# EAGLE board SparkFun_PWM_Shield_Panel_v12b (EAGLE 7.5.0)
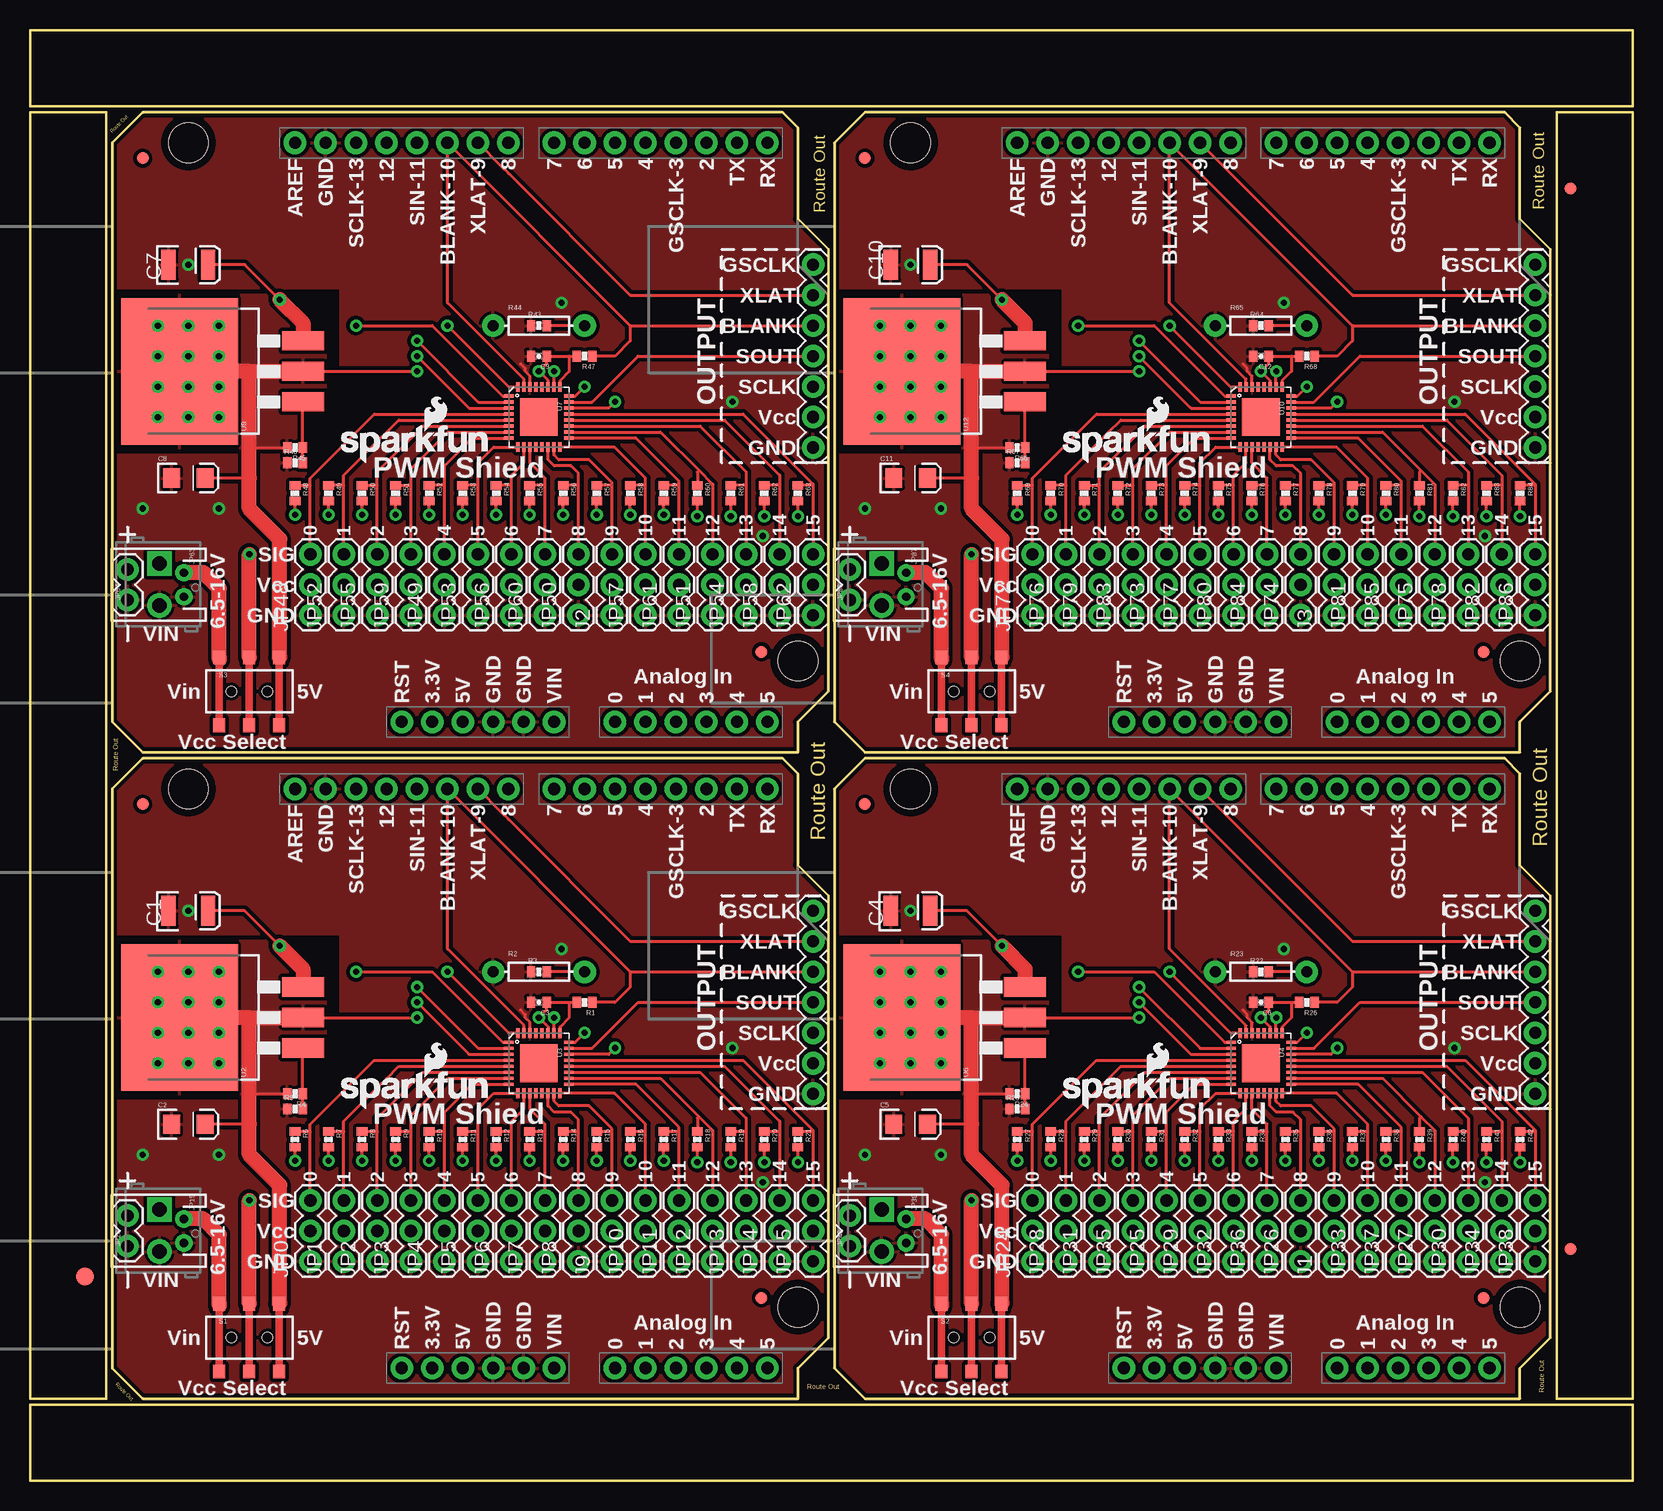
[diagram p0: board, top side]
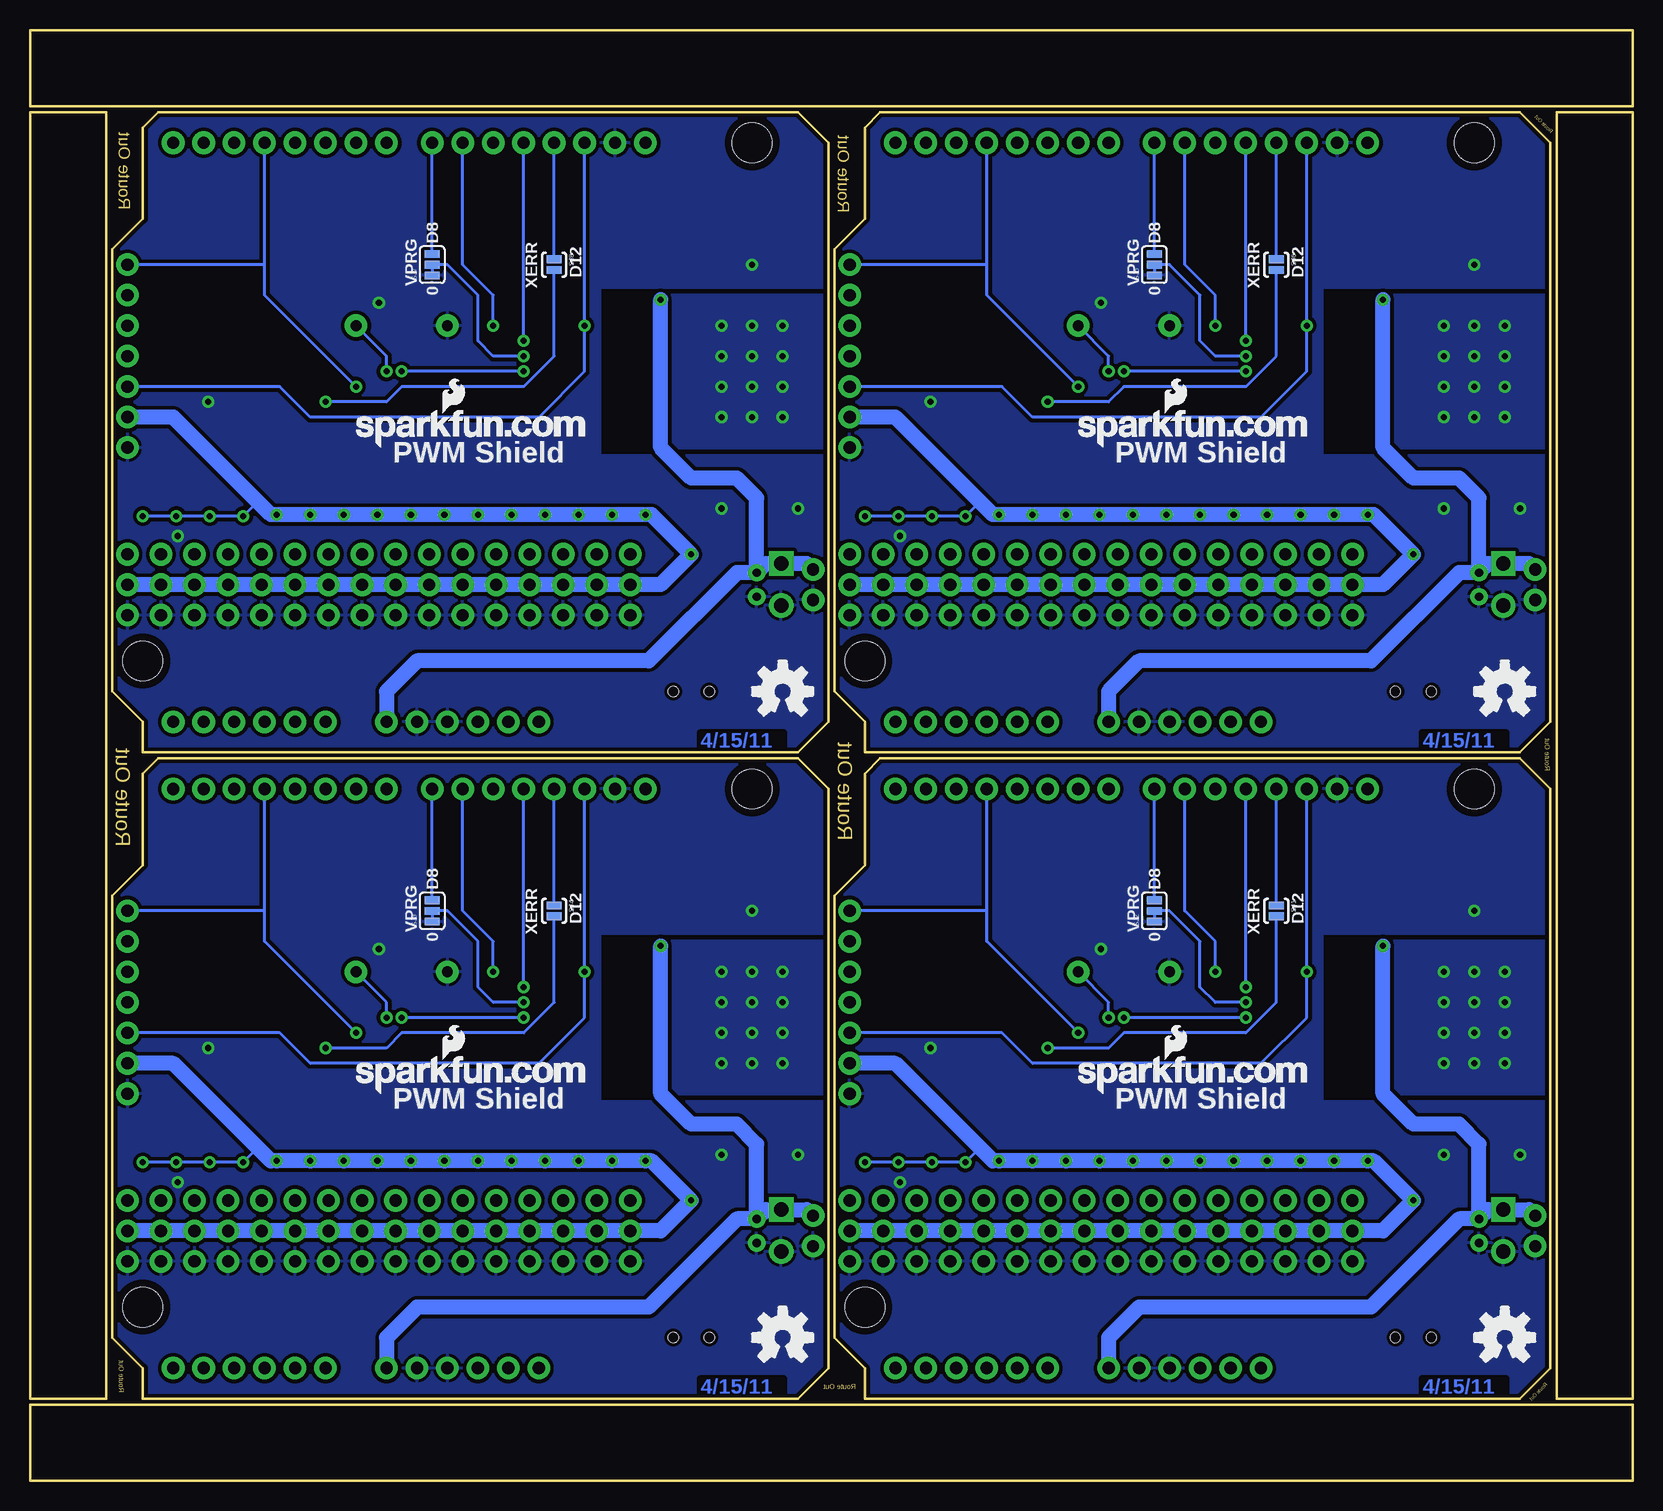
[diagram p1: board, bottom side, seen from below]

Size 133.6 x 120.9 mm. Coordinates in mm from the lower left corner, seen from the top.
Outline: 6.35,79.25 6.35,6.86 0,6.86 0,29.72
Outline: 0,27.18 0,114.05 6.35,114.05 6.35,76.71
Outline: 79.25,0 0,0 0,6.35 29.72,6.35
Outline: 27.18,6.35 133.6,6.35 133.6,0 76.71,0
Outline: 133.6,79.25 133.6,6.86 127.25,6.86 127.25,29.72
Outline: 127.25,27.18 127.25,114.05 133.6,114.05 133.6,76.71
Outline: 54.36,120.9 133.6,120.9 133.6,114.55 103.89,114.55
Outline: 106.43,114.55 0,114.55 0,120.9 56.9,120.9
Outline: 6.86,57.66 9.4,60.2 62.74,60.2 64.01,58.93 64.01,51.31 66.55,48.77 66.55,11.94 64.01,9.4 64.01,6.86 9.4,6.86 6.86,9.4 6.86,57.66
Outline: 67.06,57.66 69.6,60.2 122.94,60.2 124.21,58.93 124.21,51.31 126.75,48.77 126.75,11.94 124.21,9.4 124.21,6.86 69.6,6.86 67.06,9.4 67.06,57.66
Outline: 6.86,111.51 9.4,114.05 62.74,114.05 64.01,112.78 64.01,105.16 66.55,102.62 66.55,65.79 64.01,63.25 64.01,60.71 9.4,60.71 6.86,63.25 6.86,111.51
Outline: 67.06,111.51 69.6,114.05 122.94,114.05 124.21,112.78 124.21,105.16 126.75,102.62 126.75,65.79 124.21,63.25 124.21,60.71 69.6,60.71 67.06,63.25 67.06,111.51
Copper layers (1*16): Top 0.035mm / dielectric 1.5mm / Bottom 0.035mm
Design rules "SparkFun *": minimum track width 8mil, minimum drill 20mil, track to track 8mil, track to pad 8mil, pad to pad 8mil, via to via 8mil, smd to smd 8mil, copper to edge 8mil, drill to drill 8mil, minimum pad ring 12mil, minimum via ring 10mil, stop-mask expansion 4mil, vias tented up to drill 20mil, thermal gap 10mil

## Footprints (pad centres in the part's own frame; a part is rotated, then mirrored left to right if it is on the bottom)
EIA3528 = smd 1.2 x 2.5: A 1.65,0; C -1.65,0
EIA3216 = smd 1.4 x 1.6: A 1.4,0; C -1.4,0
0402-CAP = smd 0.7 x 0.9: 1 -0.65,0; 2 0.65,0
FIDUCIAL-1.5X3 = smd 1.5 x 1.5: 1 0,0
FIDUCIAL-1X2 = smd 1 x 1: 1 0,0
1X03 = drill 1.016 pad 1.88: 1 0,0; 2 2.54,0; 3 5.08,0
1X07 = drill 1.016 pad 1.88: 1 0,0; 2 2.54,0; 3 5.08,0; 4 7.62,0; 5 10.16,0; 6 12.7,0; 7 15.24,0
SCREWTERMINAL-3.5MM-2-NS = drill 1.2 pad 2.032 square: 1 0,0 | drill 1.2 pad 2.032: 2 3.5,0
JST-2-PTH = drill 0.7 pad 1.448: 1 -1,0; 2 1,0
1X02 = drill 1.016 pad 1.88: 1 0,0; 2 2.54,0
0402-RES = smd 0.7 x 0.9: 1 -0.65,0; 2 0.65,0
AXIAL-0.3 = drill 0.9 pad 1.88: P$1 -3.81,0; P$2 3.81,0
AYZ0202 = smd 1 x 1.15: 1 -2.5,2.825; 2 0,2.825; 3 2.5,2.825; 4 -2.5,-2.825; 5 0,-2.825; 6 2.5,-2.825 | hole 0.85: 1.5,0; -1.5,0
SJ_2S-NO = smd 0.635 x 1.27: 1 -0.45,0; 2 0.45,0
SJ_3 = smd 0.635 x 1.27: 1 -0.889,0; 2 0,0; 3 0.889,0
DUEMILANOVE_SHIELD_NOLABELS = drill 1.016 pad 1.88: 3.3V 50.8,26.67; 5V 50.8,29.21; A0 50.8,41.91; A1 50.8,44.45; A2 50.8,46.99; A3 50.8,49.53; A4 50.8,52.07; A5 50.8,54.61; AREF 2.54,15.24; D2 2.54,49.53; D3 2.54,46.99; D4 2.54,44.45; D5 2.54,41.91; D6 2.54,39.37; D7 2.54,36.83; D8 2.54,33.02; D9 2.54,30.48; D10 2.54,27.94; D11 2.54,25.4; D12 2.54,22.86; D13 2.54,20.32; GND@0 50.8,31.75; GND@1 50.8,34.29; GND@2 2.54,17.78; RES 50.8,24.13; RX 2.54,54.61; TX 2.54,52.07; VIN 50.8,36.83 | hole 3.302: 45.72,57.15; 2.54,6.35
D2PACK/A = smd 1.6 x 3.5: 1 -2.54,-8.275; 2 0,-8.275; 3 2.54,-8.275 | smd 12.2 x 9.75: TAB 0,2
QFN-32 = smd 0.285 x 0.8: 1 -1.75,-2.5; 2 -1.25,-2.5; 3 -0.75,-2.5; 4 -0.25,-2.5; 5 0.25,-2.5; 6 0.75,-2.5; 7 1.25,-2.5; 8 1.75,-2.5; 17 1.75,2.5; 18 1.25,2.5; 19 0.75,2.5; 20 0.25,2.5; 21 -0.25,2.5; 22 -0.75,2.5; 23 -1.25,2.5; 24 -1.75,2.5 | smd 0.8 x 0.285: 9 2.5,-1.75; 10 2.5,-1.25; 11 2.5,-0.75; 12 2.5,-0.25; 13 2.5,0.25; 14 2.5,0.75; 15 2.5,1.25; 16 2.5,1.75; 25 -2.5,1.75; 26 -2.5,1.25; 27 -2.5,0.75; 28 -2.5,0.25; 29 -2.5,-0.25; 30 -2.5,-0.75; 31 -2.5,-1.25; 32 -2.5,-1.75 | smd 3.15 x 3.15: EP 0,0

## Placement (x,y rotation side)
C1  10uF  [EIA3528]  13.21,47.5 0 top
C2  10uF  [EIA3216]  13.21,29.72 0 top
C3  0.1uF  [0402-CAP]  42.42,39.88 180 top
C4  10uF  [EIA3528]  73.41,47.5 0 top
C5  10uF  [EIA3216]  73.41,29.72 0 top
C6  0.1uF  [0402-CAP]  102.62,39.88 180 top
C7  10uF  [EIA3528]  13.21,101.35 0 top
C8  10uF  [EIA3216]  13.21,83.57 0 top
C9  0.1uF  [0402-CAP]  42.42,93.73 180 top
C10  10uF  [EIA3528]  73.41,101.35 0 top
C11  10uF  [EIA3216]  73.41,83.57 0 top
C12  0.1uF  [0402-CAP]  102.62,93.73 180 top
E$1  [FIDUCIAL-1.5X3]  4.57,17.02 0 top
E$5  [FIDUCIAL-1X2]  128.4,19.3 0 top
E$6  [FIDUCIAL-1X2]  128.4,107.7 180 top
J1  OUT  [1X03]  108.71,18.29 90 top
J2  OUT  [1X03]  48.51,72.14 90 top
J3  OUT  [1X03]  108.71,72.14 90 top
J9  OUT  [1X03]  48.51,18.29 90 top
JP0  OUT  [1X03]  23.37,18.29 90 top
JP1  OUT  [1X03]  26.16,18.29 90 top
JP2  OUT  [1X03]  28.96,18.29 90 top
JP3  OUT  [1X03]  31.75,18.29 90 top
JP4  OUT  [1X03]  34.54,18.29 90 top
JP5  OUT  [1X03]  37.34,18.29 90 top
JP6  OUT  [1X03]  40.13,18.29 90 top
JP7  OUT  [1X03]  42.93,18.29 90 top
JP8  OUT  [1X03]  45.72,18.29 90 top
JP9  [1X07]  65.28,47.5 270 top
JP10  OUT  [1X03]  51.31,18.29 90 top
JP11  OUT  [1X03]  54.1,18.29 90 top
JP12  OUT  [1X03]  56.9,18.29 90 top
JP13  OUT  [1X03]  59.69,18.29 90 top
JP14  OUT  [1X03]  62.48,18.29 90 top
JP15  OUT  [1X03]  65.28,18.29 90 top
JP16  LOGO-SFENEW  [SFE-NEW-WEBLOGO]  46.23,32.26 0 bottom
JP17  LOGO-SFESK  [SFE-LOGO-FLAME]  32.89,33.66 0 top
JP18  LOGO-SFENW2  [SFE-NEW-WEB]  25.91,30.99 0 top
JP19  SCREW  [SCREWTERMINAL-3.5MM-2-NS]  10.79,22.61 270 top
JP20  JST  [JST-2-PTH]  12.83,20.83 90 top
JP21  PTH  [1X02]  8.13,19.56 90 top
JP22  FIDUCIAL1X2  [FIDUCIAL-1X2]  60.96,15.24 0 top
JP23  FIDUCIAL1X2  [FIDUCIAL-1X2]  9.4,56.39 0 top
JP24  OUT  [1X03]  83.57,18.29 90 top
JP25  OUT  [1X03]  94.74,18.29 90 top
JP26  OUT  [1X03]  105.92,18.29 90 top
JP27  OUT  [1X03]  117.09,18.29 90 top
JP28  OUT  [1X03]  86.36,18.29 90 top
JP29  OUT  [1X03]  97.54,18.29 90 top
JP30  OUT  [1X03]  119.89,18.29 90 top
JP31  OUT  [1X03]  89.15,18.29 90 top
JP32  OUT  [1X03]  100.33,18.29 90 top
JP33  OUT  [1X03]  111.51,18.29 90 top
JP34  OUT  [1X03]  122.68,18.29 90 top
JP35  OUT  [1X03]  91.95,18.29 90 top
JP36  OUT  [1X03]  103.12,18.29 90 top
JP37  OUT  [1X03]  114.3,18.29 90 top
JP38  OUT  [1X03]  125.48,18.29 90 top
JP39  SCREW  [SCREWTERMINAL-3.5MM-2-NS]  70.99,22.61 270 top
JP40  JST  [JST-2-PTH]  73.03,20.83 90 top
JP41  PTH  [1X02]  68.33,19.56 90 top
JP42  LOGO-SFENW2  [SFE-NEW-WEB]  86.11,30.99 0 top
JP43  [1X07]  125.48,47.5 270 top
JP44  LOGO-SFENEW  [SFE-NEW-WEBLOGO]  106.43,32.26 0 bottom
JP45  LOGO-SFESK  [SFE-LOGO-FLAME]  93.09,33.66 0 top
JP46  FIDUCIAL1X2  [FIDUCIAL-1X2]  121.16,15.24 0 top
JP47  FIDUCIAL1X2  [FIDUCIAL-1X2]  69.6,56.39 0 top
JP48  OUT  [1X03]  23.37,72.14 90 top
JP49  OUT  [1X03]  34.54,72.14 90 top
JP50  OUT  [1X03]  45.72,72.14 90 top
JP51  OUT  [1X03]  56.9,72.14 90 top
JP52  OUT  [1X03]  26.16,72.14 90 top
JP53  OUT  [1X03]  37.34,72.14 90 top
JP54  OUT  [1X03]  59.69,72.14 90 top
JP55  OUT  [1X03]  28.96,72.14 90 top
JP56  OUT  [1X03]  40.13,72.14 90 top
JP57  OUT  [1X03]  51.31,72.14 90 top
JP58  OUT  [1X03]  62.48,72.14 90 top
JP59  OUT  [1X03]  31.75,72.14 90 top
JP60  OUT  [1X03]  42.93,72.14 90 top
JP61  OUT  [1X03]  54.1,72.14 90 top
JP62  OUT  [1X03]  65.28,72.14 90 top
JP63  SCREW  [SCREWTERMINAL-3.5MM-2-NS]  10.79,76.45 270 top
JP64  JST  [JST-2-PTH]  12.83,74.68 90 top
JP65  PTH  [1X02]  8.13,73.41 90 top
JP66  LOGO-SFENW2  [SFE-NEW-WEB]  25.91,84.84 0 top
JP67  [1X07]  65.28,101.35 270 top
JP68  LOGO-SFENEW  [SFE-NEW-WEBLOGO]  46.23,86.11 0 bottom
JP69  LOGO-SFESK  [SFE-LOGO-FLAME]  32.89,87.5 0 top
JP70  FIDUCIAL1X2  [FIDUCIAL-1X2]  60.96,69.09 0 top
JP71  FIDUCIAL1X2  [FIDUCIAL-1X2]  9.4,110.24 0 top
JP72  OUT  [1X03]  83.57,72.14 90 top
JP73  OUT  [1X03]  94.74,72.14 90 top
JP74  OUT  [1X03]  105.92,72.14 90 top
JP75  OUT  [1X03]  117.09,72.14 90 top
JP76  OUT  [1X03]  86.36,72.14 90 top
JP77  OUT  [1X03]  97.54,72.14 90 top
JP78  OUT  [1X03]  119.89,72.14 90 top
JP79  OUT  [1X03]  89.15,72.14 90 top
JP80  OUT  [1X03]  100.33,72.14 90 top
JP81  OUT  [1X03]  111.51,72.14 90 top
JP82  OUT  [1X03]  122.68,72.14 90 top
JP83  OUT  [1X03]  91.95,72.14 90 top
JP84  OUT  [1X03]  103.12,72.14 90 top
JP85  OUT  [1X03]  114.3,72.14 90 top
JP86  OUT  [1X03]  125.48,72.14 90 top
JP87  SCREW  [SCREWTERMINAL-3.5MM-2-NS]  70.99,76.45 270 top
JP88  JST  [JST-2-PTH]  73.03,74.68 90 top
JP89  PTH  [1X02]  68.33,73.41 90 top
JP90  LOGO-SFENW2  [SFE-NEW-WEB]  86.11,84.84 0 top
JP91  [1X07]  125.48,101.35 270 top
JP92  LOGO-SFENEW  [SFE-NEW-WEBLOGO]  106.43,86.11 0 bottom
JP93  LOGO-SFESK  [SFE-LOGO-FLAME]  93.09,87.5 0 top
JP94  FIDUCIAL1X2  [FIDUCIAL-1X2]  121.16,69.09 0 top
JP95  FIDUCIAL1X2  [FIDUCIAL-1X2]  69.6,110.24 0 top
R1  10k  [0402-RES]  46.23,39.88 180 top
R2  R2  [AXIAL-0.3]  42.42,42.42 0 top
R3  2.2k  [0402-RES]  42.42,42.42 0 top
R4  240  [0402-RES]  22.1,32.26 180 top
R5  715  [0402-RES]  22.1,30.99 0 top
R6  2.2k  [0402-RES]  22.1,28.45 270 top
R7  2.2k  [0402-RES]  24.89,28.45 270 top
R8  2.2k  [0402-RES]  27.69,28.45 270 top
R9  2.2k  [0402-RES]  30.48,28.45 270 top
R10  2.2k  [0402-RES]  33.27,28.45 270 top
R11  2.2k  [0402-RES]  36.07,28.45 270 top
R12  2.2k  [0402-RES]  38.86,28.45 270 top
R13  2.2k  [0402-RES]  41.66,28.45 270 top
R14  2.2k  [0402-RES]  44.45,28.45 270 top
R15  2.2k  [0402-RES]  47.24,28.45 270 top
R16  2.2k  [0402-RES]  50.04,28.45 270 top
R17  2.2k  [0402-RES]  52.83,28.45 270 top
R18  2.2k  [0402-RES]  55.63,28.45 270 top
R19  2.2k  [0402-RES]  58.42,28.45 270 top
R20  2.2k  [0402-RES]  61.21,28.45 270 top
R21  2.2k  [0402-RES]  64.01,28.45 270 top
R22  2.2k  [0402-RES]  102.62,42.42 0 top
R23  R2  [AXIAL-0.3]  102.62,42.42 0 top
R24  240  [0402-RES]  82.3,32.26 180 top
R25  715  [0402-RES]  82.3,30.99 0 top
R26  10k  [0402-RES]  106.43,39.88 180 top
R27  2.2k  [0402-RES]  82.3,28.45 270 top
R28  2.2k  [0402-RES]  85.09,28.45 270 top
R29  2.2k  [0402-RES]  87.88,28.45 270 top
R30  2.2k  [0402-RES]  90.68,28.45 270 top
R31  2.2k  [0402-RES]  93.47,28.45 270 top
R32  2.2k  [0402-RES]  96.27,28.45 270 top
R33  2.2k  [0402-RES]  99.06,28.45 270 top
R34  2.2k  [0402-RES]  101.85,28.45 270 top
R35  2.2k  [0402-RES]  104.65,28.45 270 top
R36  2.2k  [0402-RES]  107.44,28.45 270 top
R37  2.2k  [0402-RES]  110.24,28.45 270 top
R38  2.2k  [0402-RES]  113.03,28.45 270 top
R39  2.2k  [0402-RES]  115.82,28.45 270 top
R40  2.2k  [0402-RES]  118.62,28.45 270 top
R41  2.2k  [0402-RES]  121.41,28.45 270 top
R42  2.2k  [0402-RES]  124.21,28.45 270 top
R43  2.2k  [0402-RES]  42.42,96.27 0 top
R44  R2  [AXIAL-0.3]  42.42,96.27 0 top
R45  240  [0402-RES]  22.1,86.11 180 top
R46  715  [0402-RES]  22.1,84.84 0 top
R47  10k  [0402-RES]  46.23,93.73 180 top
R48  2.2k  [0402-RES]  22.1,82.3 270 top
R49  2.2k  [0402-RES]  24.89,82.3 270 top
R50  2.2k  [0402-RES]  27.69,82.3 270 top
R51  2.2k  [0402-RES]  30.48,82.3 270 top
R52  2.2k  [0402-RES]  33.27,82.3 270 top
R53  2.2k  [0402-RES]  36.07,82.3 270 top
R54  2.2k  [0402-RES]  38.86,82.3 270 top
R55  2.2k  [0402-RES]  41.66,82.3 270 top
R56  2.2k  [0402-RES]  44.45,82.3 270 top
R57  2.2k  [0402-RES]  47.24,82.3 270 top
R58  2.2k  [0402-RES]  50.04,82.3 270 top
R59  2.2k  [0402-RES]  52.83,82.3 270 top
R60  2.2k  [0402-RES]  55.63,82.3 270 top
R61  2.2k  [0402-RES]  58.42,82.3 270 top
R62  2.2k  [0402-RES]  61.21,82.3 270 top
R63  2.2k  [0402-RES]  64.01,82.3 270 top
R64  2.2k  [0402-RES]  102.62,96.27 0 top
R65  R2  [AXIAL-0.3]  102.62,96.27 0 top
R66  240  [0402-RES]  82.3,86.11 180 top
R67  715  [0402-RES]  82.3,84.84 0 top
R68  10k  [0402-RES]  106.43,93.73 180 top
R69  2.2k  [0402-RES]  82.3,82.3 270 top
R70  2.2k  [0402-RES]  85.09,82.3 270 top
R71  2.2k  [0402-RES]  87.88,82.3 270 top
R72  2.2k  [0402-RES]  90.68,82.3 270 top
R73  2.2k  [0402-RES]  93.47,82.3 270 top
R74  2.2k  [0402-RES]  96.27,82.3 270 top
R75  2.2k  [0402-RES]  99.06,82.3 270 top
R76  2.2k  [0402-RES]  101.85,82.3 270 top
R77  2.2k  [0402-RES]  104.65,82.3 270 top
R78  2.2k  [0402-RES]  107.44,82.3 270 top
R79  2.2k  [0402-RES]  110.24,82.3 270 top
R80  2.2k  [0402-RES]  113.03,82.3 270 top
R81  2.2k  [0402-RES]  115.82,82.3 270 top
R82  2.2k  [0402-RES]  118.62,82.3 270 top
R83  2.2k  [0402-RES]  121.41,82.3 270 top
R84  2.2k  [0402-RES]  124.21,82.3 270 top
S1  DPDT  [AYZ0202]  18.29,11.94 0 top
S2  DPDT  [AYZ0202]  78.49,11.94 0 top
S3  DPDT  [AYZ0202]  18.29,65.79 0 top
S4  DPDT  [AYZ0202]  78.49,65.79 0 top
SJ1  XERR  [SJ_2S-NO]  29.72,47.5 270 bottom
SJ2  VPRG  [SJ_3]  39.88,47.5 90 bottom
SJ3  VPRG  [SJ_3]  100.08,47.5 90 bottom
SJ4  XERR  [SJ_2S-NO]  89.92,47.5 270 bottom
SJ5  VPRG  [SJ_3]  39.88,101.35 90 bottom
SJ6  XERR  [SJ_2S-NO]  29.72,101.35 270 bottom
SJ7  VPRG  [SJ_3]  100.08,101.35 90 bottom
SJ8  XERR  [SJ_2S-NO]  89.92,101.35 270 bottom
U1  ARDUINO_SHIELDNOLABELS  [DUEMILANOVE_SHIELD_NOLABELS]  6.86,60.2 270 top
U2  V_REG_LD1085D2  [D2PACK/A]  14.48,38.61 90 top
U3  TLC5940-RHB  [QFN-32]  42.42,34.8 270 top
U4  TLC5940-RHB  [QFN-32]  102.62,34.8 270 top
U5  ARDUINO_SHIELDNOLABELS  [DUEMILANOVE_SHIELD_NOLABELS]  67.06,60.2 270 top
U6  V_REG_LD1085D2  [D2PACK/A]  74.68,38.61 90 top
U7  TLC5940-RHB  [QFN-32]  42.42,88.65 270 top
U8  ARDUINO_SHIELDNOLABELS  [DUEMILANOVE_SHIELD_NOLABELS]  6.86,114.05 270 top
U9  V_REG_LD1085D2  [D2PACK/A]  14.48,92.46 90 top
U10  TLC5940-RHB  [QFN-32]  102.62,88.65 270 top
U11  ARDUINO_SHIELDNOLABELS  [DUEMILANOVE_SHIELD_NOLABELS]  67.06,114.05 270 top
U12  V_REG_LD1085D2  [D2PACK/A]  74.68,92.46 90 top
U$1  OSHW-LOGOORB  [OSHW-LOGO-GO]  10.67,11.94 0 bottom
U$2  OSHW-LOGOORB  [OSHW-LOGO-GO]  70.87,11.94 0 bottom
U$3  OSHW-LOGOORB  [OSHW-LOGO-GO]  10.67,65.79 0 bottom
U$4  OSHW-LOGOORB  [OSHW-LOGO-GO]  70.87,65.79 0 bottom

## Library data of the parts
C1-C12 J1-J3 J9 JP0 JP1-JP95 R1-R84 S1-S4 SJ1-SJ8 U1-U12 U$1-U$4 = SparkFun
E$1 = SparkFun-Retired
E$5 E$6 = SparkFun-Aesthetics

## Nets
5V: C2.A C3.1 R1.2 R4.2 S1.3 U2.2 U2.TAB U3.25 U3.27
5V1: C5.A C6.1 R24.2 R26.2 S2.3 U4.25 U4.27 U6.2 U6.TAB
5V2: C8.A C9.1 R45.2 R47.2 S3.3 U7.25 U7.27 U9.2 U9.TAB
5V3: C11.A C12.1 R66.2 R68.2 S4.3 U10.25 U10.27 U12.2 U12.TAB
BLANK: JP9.3 R1.1 U1.D10 U3.31
BLANK1: JP43.3 R26.1 U4.31 U5.D10
BLANK2: JP67.3 R47.1 U7.31 U8.D10
BLANK3: JP91.3 R68.1 U10.31 U11.D10
D1: SJ3.3 U5.D8
D2: SJ4.1 U5.D12
D3: SJ5.3 U8.D8
D4: SJ6.1 U8.D12
D5: SJ7.3 U11.D8
D6: SJ8.1 U11.D12
D8: SJ2.3 U1.D8
D12: SJ1.1 U1.D12
GND: C1.C C2.C C3.2 J9.1 JP0.1 JP1.1 JP2.1 JP3.1 JP4.1 JP5.1 JP6.1 JP7.1 JP8.1 JP9.7 JP10.1 JP11.1 JP12.1 JP13.1 JP14.1 JP15.1 JP19.2 JP20.1 JP21.1 R2.P$1 R3.1 R5.1 SJ2.1 U1.GND@0 U1.GND@1 U1.GND@2 U3.30
GND1: C4.C C5.C C6.2 J1.1 JP24.1 JP25.1 JP26.1 JP27.1 JP28.1 JP29.1 JP30.1 JP31.1 JP32.1 JP33.1 JP34.1 JP35.1 JP36.1 JP37.1 JP38.1 JP39.2 JP40.1 JP41.1 JP43.7 R22.1 R23.P$1 R25.1 SJ3.1 U4.30 U5.GND@0 U5.GND@1 U5.GND@2
GND2: C7.C C8.C C9.2 J2.1 JP48.1 JP49.1 JP50.1 JP51.1 JP52.1 JP53.1 JP54.1 JP55.1 JP56.1 JP57.1 JP58.1 JP59.1 JP60.1 JP61.1 JP62.1 JP63.2 JP64.1 JP65.1 JP67.7 R43.1 R44.P$1 R46.1 SJ5.1 U7.30 U8.GND@0 U8.GND@1 U8.GND@2
GND3: C10.C C11.C C12.2 J3.1 JP72.1 JP73.1 JP74.1 JP75.1 JP76.1 JP77.1 JP78.1 JP79.1 JP80.1 JP81.1 JP82.1 JP83.1 JP84.1 JP85.1 JP86.1 JP87.2 JP88.1 JP89.1 JP91.7 R64.1 R65.P$1 R67.1 SJ7.1 U10.30 U11.GND@0 U11.GND@1 U11.GND@2
GSCLK: JP9.1 U1.D3 U3.24
GSCLK1: JP43.1 U4.24 U5.D3
GSCLK2: JP67.1 U7.24 U8.D3
GSCLK3: JP91.1 U10.24 U11.D3
N$1: R22.2 R23.P$2 U4.26
N$2: R4.1 R5.2 U2.1
N$3: R24.1 R25.2 U6.1
N$4: R43.2 R44.P$2 U7.26
N$5: R45.1 R46.2 U9.1
N$6: R64.2 R65.P$2 U10.26
N$7: R66.1 R67.2 U12.1
N$8: R2.P$2 R3.2 U3.26
OUT0: JP0.3 R6.1 U3.4
OUT1: JP1.3 R7.1 U3.5
OUT2: JP2.3 R8.1 U3.6
OUT3: JP3.3 R9.1 U3.7
OUT4: JP4.3 R10.1 U3.8
OUT5: JP5.3 R11.1 U3.9
OUT6: JP6.3 R12.1 U3.10
OUT7: JP7.3 R13.1 U3.11
OUT8: JP8.3 R14.1 U3.14
OUT9: J9.3 R15.1 U3.15
OUT10: JP10.3 R16.1 U3.16
OUT11: JP11.3 R17.1 U3.17
OUT12: JP12.3 R18.1 U3.18
OUT13: JP13.3 R19.1 U3.19
OUT14: JP14.3 R20.1 U3.20
OUT15: JP15.3 R21.1 U3.21
OUT16: JP24.3 R27.1 U4.4
OUT17: JP31.3 R29.1 U4.6
OUT18: JP28.3 R28.1 U4.5
OUT19: JP35.3 R30.1 U4.7
OUT20: JP25.3 R31.1 U4.8
OUT21: JP29.3 R32.1 U4.9
OUT22: JP32.3 R33.1 U4.10
OUT23: JP36.3 R34.1 U4.11
OUT24: JP26.3 R35.1 U4.14
OUT25: J1.3 R36.1 U4.15
OUT26: JP33.3 R37.1 U4.16
OUT27: JP37.3 R38.1 U4.17
OUT28: JP27.3 R39.1 U4.18
OUT29: JP30.3 R40.1 U4.19
OUT30: JP34.3 R41.1 U4.20
OUT31: JP38.3 R42.1 U4.21
OUT32: JP48.3 R48.1 U7.4
OUT33: JP55.3 R50.1 U7.6
OUT34: JP52.3 R49.1 U7.5
OUT35: JP59.3 R51.1 U7.7
OUT36: JP49.3 R52.1 U7.8
OUT37: JP53.3 R53.1 U7.9
OUT38: JP56.3 R54.1 U7.10
OUT39: JP60.3 R55.1 U7.11
OUT40: JP50.3 R56.1 U7.14
OUT41: J2.3 R57.1 U7.15
OUT42: JP57.3 R58.1 U7.16
OUT43: JP61.3 R59.1 U7.17
OUT44: JP51.3 R60.1 U7.18
OUT45: JP54.3 R61.1 U7.19
OUT46: JP58.3 R62.1 U7.20
OUT47: JP62.3 R63.1 U7.21
OUT48: JP72.3 R69.1 U10.4
OUT49: JP79.3 R71.1 U10.6
OUT50: JP76.3 R70.1 U10.5
OUT51: JP83.3 R72.1 U10.7
OUT52: JP73.3 R73.1 U10.8
OUT53: JP77.3 R74.1 U10.9
OUT54: JP80.3 R75.1 U10.10
OUT55: JP84.3 R76.1 U10.11
OUT56: JP74.3 R77.1 U10.14
OUT57: J3.3 R78.1 U10.15
OUT58: JP81.3 R79.1 U10.16
OUT59: JP85.3 R80.1 U10.17
OUT60: JP75.3 R81.1 U10.18
OUT61: JP78.3 R82.1 U10.19
OUT62: JP82.3 R83.1 U10.20
OUT63: JP86.3 R84.1 U10.21
SCLK: JP9.5 U1.D13 U3.1
SCLK1: JP43.5 U4.1 U5.D13
SCLK2: JP67.5 U7.1 U8.D13
SCLK3: JP91.5 U10.1 U11.D13
SIN: U1.D11 U3.2
SIN1: U4.2 U5.D11
SIN2: U7.2 U8.D11
SIN3: U10.2 U11.D11
SOUT: JP9.4 U3.23
SOUT1: JP43.4 U4.23
SOUT2: JP67.4 U7.23
SOUT3: JP91.4 U10.23
VCC: J9.2 JP0.2 JP1.2 JP2.2 JP3.2 JP4.2 JP5.2 JP6.2 JP7.2 JP8.2 JP9.6 JP10.2 JP11.2 JP12.2 JP13.2 JP14.2 JP15.2 R6.2 R7.2 R8.2 R9.2 R10.2 R11.2 R12.2 R13.2 R14.2 R15.2 R16.2 R17.2 R18.2 R19.2 R20.2 R21.2 S1.2
VCC1: J1.2 JP24.2 JP25.2 JP26.2 JP27.2 JP28.2 JP29.2 JP30.2 JP31.2 JP32.2 JP33.2 JP34.2 JP35.2 JP36.2 JP37.2 JP38.2 JP43.6 R27.2 R28.2 R29.2 R30.2 R31.2 R32.2 R33.2 R34.2 R35.2 R36.2 R37.2 R38.2 R39.2 R40.2 R41.2 R42.2 S2.2
VCC2: J2.2 JP48.2 JP49.2 JP50.2 JP51.2 JP52.2 JP53.2 JP54.2 JP55.2 JP56.2 JP57.2 JP58.2 JP59.2 JP60.2 JP61.2 JP62.2 JP67.6 R48.2 R49.2 R50.2 R51.2 R52.2 R53.2 R54.2 R55.2 R56.2 R57.2 R58.2 R59.2 R60.2 R61.2 R62.2 R63.2 S3.2
VCC3: J3.2 JP72.2 JP73.2 JP74.2 JP75.2 JP76.2 JP77.2 JP78.2 JP79.2 JP80.2 JP81.2 JP82.2 JP83.2 JP84.2 JP85.2 JP86.2 JP91.6 R69.2 R70.2 R71.2 R72.2 R73.2 R74.2 R75.2 R76.2 R77.2 R78.2 R79.2 R80.2 R81.2 R82.2 R83.2 R84.2 S4.2
VIN: C1.A JP19.1 JP20.2 JP21.2 S1.1 U1.VIN U2.3
VIN1: C4.A JP39.1 JP40.2 JP41.2 S2.1 U5.VIN U6.3
VIN2: C7.A JP63.1 JP64.2 JP65.2 S3.1 U8.VIN U9.3
VIN3: C10.A JP87.1 JP88.2 JP89.2 S4.1 U11.VIN U12.3
VPRG: SJ2.2 U3.3
VPRG1: SJ3.2 U4.3
VPRG2: SJ5.2 U7.3
VPRG3: SJ7.2 U10.3
XERR: SJ1.2 U3.22
XERR1: SJ4.2 U4.22
XERR2: SJ6.2 U7.22
XERR3: SJ8.2 U10.22
XLAT: JP9.2 U1.D9 U3.32
XLAT1: JP43.2 U4.32 U5.D9
XLAT2: JP67.2 U7.32 U8.D9
XLAT3: JP91.2 U10.32 U11.D9

## Tracks (layer width: path | path; a pad name or v marks a point on that pad's centre or on a via)
5V  (via drill 0.51)
  Top 0.254: 18.29,29.72 C2.A | 18.29,32.26 R4.2 | U3.27 43.17,37.86 v42.42,38.61 43.07,39.26 C3.1 44.96,39.88 | 13.21,38.61 v13.21,37.34 | 44.96,39.88 R1.2 | U3.25 44.17,37.82 44.96,38.61 44.96,39.88 | U2.2 23.37,38.61 v32.26,38.61
  Top 0.635: 20.79,9.14 S1.3
  Top 0.762: 13.21,38.61 U2.TAB
  Top 1.27: 18.29,38.61 13.21,38.61 | 18.29,38.61 23.37,38.61 | 18.29,38.61 18.29,29.72 18.29,27.18 20.83,24.64 20.83,14.8 S1.3
  Bottom 0.254: v32.26,38.61 v42.42,38.61
  other vias: 10.67,42.42 13.21,42.42 10.67,34.8 13.21,34.8 10.67,39.88 13.21,39.88 10.67,37.34 15.75,42.42 15.75,39.88 15.75,37.34 15.75,34.8
  pour Top (isolate 0.305): 6.86,44.96 6.86,32.26 24.64,32.26 24.64,44.96
  pour Bottom (isolate 0.305): 6.86,44.96 24.64,44.96 24.64,32.26 6.86,32.26
5V1  (via drill 0.51)
  Top 0.254: 78.49,29.72 C5.A | 78.49,32.26 R24.2 | U4.27 103.37,37.86 v102.62,38.61 103.27,39.26 C6.1 105.16,39.88 | 73.41,38.61 v73.41,37.34 | 105.16,39.88 R26.2 | U4.25 104.37,37.82 105.16,38.61 105.16,39.88 | U6.2 83.57,38.61 v92.46,38.61
  Top 0.635: 80.99,9.14 S2.3
  Top 0.762: 73.41,38.61 U6.TAB
  Top 1.27: 78.49,38.61 73.41,38.61 | 78.49,38.61 83.57,38.61 | 78.49,38.61 78.49,29.72 78.49,27.18 81.03,24.64 81.03,14.8 S2.3
  Bottom 0.254: v92.46,38.61 v102.62,38.61
  other vias: 70.87,42.42 73.41,42.42 70.87,34.8 73.41,34.8 70.87,39.88 73.41,39.88 70.87,37.34 75.95,42.42 75.95,39.88 75.95,37.34 75.95,34.8
  pour Top (isolate 0.305): 67.06,44.96 67.06,32.26 84.84,32.26 84.84,44.96
  pour Bottom (isolate 0.305): 67.06,44.96 84.84,44.96 84.84,32.26 67.06,32.26
5V2  (via drill 0.51)
  Top 0.254: 18.29,83.57 C8.A | 18.29,86.11 R45.2 | U7.27 43.17,91.71 v42.42,92.46 43.07,93.11 C9.1 44.96,93.73 | 13.21,92.46 v13.21,91.19 | 44.96,93.73 R47.2 | U7.25 44.17,91.67 44.96,92.46 44.96,93.73 | U9.2 23.37,92.46 v32.26,92.46
  Top 0.635: 20.79,62.99 S3.3
  Top 0.762: 13.21,92.46 U9.TAB
  Top 1.27: 18.29,92.46 13.21,92.46 | 18.29,92.46 23.37,92.46 | 18.29,92.46 18.29,83.57 18.29,81.03 20.83,78.49 20.83,68.65 S3.3
  Bottom 0.254: v32.26,92.46 v42.42,92.46
  other vias: 10.67,96.27 13.21,96.27 10.67,88.65 13.21,88.65 10.67,93.73 13.21,93.73 10.67,91.19 15.75,96.27 15.75,93.73 15.75,91.19 15.75,88.65
  pour Top (isolate 0.305): 6.86,98.81 6.86,86.11 24.64,86.11 24.64,98.81
  pour Bottom (isolate 0.305): 6.86,98.81 24.64,98.81 24.64,86.11 6.86,86.11
5V3  (via drill 0.51)
  Top 0.254: 78.49,83.57 C11.A | 78.49,86.11 R66.2 | U10.27 103.37,91.71 v102.62,92.46 103.27,93.11 C12.1 105.16,93.73 | 73.41,92.46 v73.41,91.19 | 105.16,93.73 R68.2 | U10.25 104.37,91.67 105.16,92.46 105.16,93.73 | U12.2 83.57,92.46 v92.46,92.46
  Top 0.635: 80.99,62.99 S4.3
  Top 0.762: 73.41,92.46 U12.TAB
  Top 1.27: 78.49,92.46 73.41,92.46 | 78.49,92.46 83.57,92.46 | 78.49,92.46 78.49,83.57 78.49,81.03 81.03,78.49 81.03,68.65 S4.3
  Bottom 0.254: v92.46,92.46 v102.62,92.46
  other vias: 70.87,96.27 73.41,96.27 70.87,88.65 73.41,88.65 70.87,93.73 73.41,93.73 70.87,91.19 75.95,96.27 75.95,93.73 75.95,91.19 75.95,88.65
  pour Top (isolate 0.305): 67.06,98.81 67.06,86.11 84.84,86.11 84.84,98.81
  pour Bottom (isolate 0.305): 67.06,98.81 84.84,98.81 84.84,86.11 67.06,86.11
BLANK
  Top 0.254: U3.31 41.17,37.95 34.8,44.32 U1.D10 50.04,42.42 | R1.1 48.77,39.88 50.04,41.15 50.04,42.42 | 50.04,42.42 JP9.3
BLANK1
  Top 0.254: U4.31 101.37,37.95 95,44.32 U5.D10 110.24,42.42 | R26.1 108.97,39.88 110.24,41.15 110.24,42.42 | 110.24,42.42 JP43.3
BLANK2
  Top 0.254: U7.31 41.17,91.8 34.8,98.17 U8.D10 50.04,96.27 | R47.1 48.77,93.73 50.04,95 50.04,96.27 | 50.04,96.27 JP67.3
BLANK3
  Top 0.254: U10.31 101.37,91.8 95,98.17 U11.D10 110.24,96.27 | R68.1 108.97,93.73 110.24,95 110.24,96.27 | 110.24,96.27 JP91.3
D1
  Bottom 0.254: SJ3.3 U5.D8
D2
  Bottom 0.254: SJ4.1 U5.D12
D3
  Bottom 0.254: SJ5.3 U8.D8
D4
  Bottom 0.254: SJ6.1 U8.D12
D5
  Bottom 0.254: SJ7.3 U11.D8
D6
  Bottom 0.254: SJ8.1 U11.D12
D8
  Bottom 0.254: SJ2.3 U1.D8
D12
  Bottom 0.254: SJ1.1 U1.D12
GND  (via drill 0.51)
  Top 0.254: U3.30 41.67,38.22 41.27,38.61 41.27,38.86 40.89,39.24
  other vias: 9.4,27.18 44.32,44.32 58.55,36.07 13.21,47.5 61.09,24.89 15.75,27.18
  pour Top (isolate 0.305): 6.86,60.2 6.86,45.59 25.91,45.59 25.91,31.62 6.86,31.62 6.86,6.86 66.55,6.86 66.55,60.2
  pour Bottom (isolate 0.305): 6.86,60.2 6.86,45.59 25.91,45.59 25.91,31.62 6.86,31.62 6.86,6.86 66.55,6.86 66.55,60.2
GND1  (via drill 0.51)
  Top 0.254: U4.30 101.87,38.22 101.47,38.61 101.47,38.86 101.09,39.24
  other vias: 69.6,27.18 104.52,44.32 118.75,36.07 73.41,47.5 121.28,24.89 75.95,27.18
  pour Top (isolate 0.305): 67.06,60.2 67.06,45.59 86.11,45.59 86.11,31.62 67.06,31.62 67.06,6.86 126.75,6.86 126.75,60.2
  pour Bottom (isolate 0.305): 67.06,60.2 67.06,45.59 86.11,45.59 86.11,31.62 67.06,31.62 67.06,6.86 126.75,6.86 126.75,60.2
GND2  (via drill 0.51)
  Top 0.254: U7.30 41.67,92.06 41.27,92.46 41.27,92.71 40.89,93.09
  other vias: 9.4,81.03 44.32,98.17 58.55,89.92 13.21,101.35 61.09,78.74 15.75,81.03
  pour Top (isolate 0.305): 6.86,114.05 6.86,99.44 25.91,99.44 25.91,85.47 6.86,85.47 6.86,60.71 66.55,60.71 66.55,114.05
  pour Bottom (isolate 0.305): 6.86,114.05 6.86,99.44 25.91,99.44 25.91,85.47 6.86,85.47 6.86,60.71 66.55,60.71 66.55,114.05
GND3  (via drill 0.51)
  Top 0.254: U10.30 101.87,92.06 101.47,92.46 101.47,92.71 101.09,93.09
  other vias: 69.6,81.03 104.52,98.17 118.75,89.92 73.41,101.35 121.28,78.74 75.95,81.03
  pour Top (isolate 0.305): 67.06,114.05 67.06,99.44 86.11,99.44 86.11,85.47 67.06,85.47 67.06,60.71 126.75,60.71 126.75,114.05
  pour Bottom (isolate 0.305): 67.06,114.05 67.06,99.44 86.11,99.44 86.11,85.47 67.06,85.47 67.06,60.71 126.75,60.71 126.75,114.05
GSCLK  (via drill 0.51)
  Top 0.254: U3.24 45.44,36.55 v46.23,37.34
  Bottom 0.254: v46.23,37.34 53.85,44.96 53.85,47.5 | 53.85,47.5 U1.D3 | 53.85,47.5 JP9.1
GSCLK1  (via drill 0.51)
  Top 0.254: U4.24 105.64,36.55 v106.43,37.34
  Bottom 0.254: v106.43,37.34 114.05,44.96 114.05,47.5 | 114.05,47.5 U5.D3 | 114.05,47.5 JP43.1
GSCLK2  (via drill 0.51)
  Top 0.254: U7.24 45.44,90.4 v46.23,91.19
  Bottom 0.254: v46.23,91.19 53.85,98.81 53.85,101.35 | 53.85,101.35 U8.D3 | 53.85,101.35 JP67.1
GSCLK3  (via drill 0.51)
  Top 0.254: U10.24 105.64,90.4 v106.43,91.19
  Bottom 0.254: v106.43,91.19 114.05,98.81 114.05,101.35 | 114.05,101.35 U11.D3 | 114.05,101.35 JP91.1
N$1  (via drill 0.51)
  Top 0.254: U4.26 103.87,38.59 v103.89,38.61 | R23.P$2 R22.2
  Bottom 0.254: v103.89,38.61 103.89,39.88 R23.P$2
N$2
  Top 0.254: R5.2 R4.1 U2.1
N$3
  Top 0.254: R25.2 R24.1 U6.1
N$4  (via drill 0.51)
  Top 0.254: U7.26 43.67,92.44 v43.69,92.46 | R44.P$2 R43.2
  Bottom 0.254: v43.69,92.46 43.69,93.73 R44.P$2
N$5
  Top 0.254: R46.2 R45.1 U9.1
N$6  (via drill 0.51)
  Top 0.254: U10.26 103.87,92.44 v103.89,92.46 | R65.P$2 R64.2
  Bottom 0.254: v103.89,92.46 103.89,93.73 R65.P$2
N$7
  Top 0.254: R67.2 R66.1 U12.1
N$8  (via drill 0.51)
  Top 0.254: U3.26 43.67,38.59 v43.69,38.61 | R2.P$2 R3.2
  Bottom 0.254: v43.69,38.61 43.69,39.88 R2.P$2
OUT0
  Top 0.254: U3.4 28.7,35.05 23.37,29.72 23.37,29.08 | JP0.3 23.37,29.08 | 23.37,29.08 23.35,29.1 | 23.37,29.08 22.11,29.08 R6.1
OUT1
  Top 0.254: JP1.3 26.16,29.08 | 26.16,29.08 26.16,29.97 29.08,32.89 29.72,33.53 30.74,34.55 U3.5 | 26.16,29.08 26.15,29.1 R7.1
OUT2
  Top 0.254: U3.6 32.78,34.05 28.96,30.23 28.96,29.08 | JP2.3 28.96,29.08 | 28.96,29.08 28.94,29.1 | 28.96,29.08 27.7,29.08 R8.1
OUT3
  Top 0.254: JP3.3 31.75,29.08 | 31.75,29.08 31.75,30.48 34.82,33.55 U3.7 | 31.75,29.08 31.73,29.1 | 31.75,29.08 30.5,29.08 R9.1
OUT4
  Top 0.254: JP4.3 34.54,29.08 | 34.54,29.08 34.54,30.73 36.86,33.05 U3.8 | R10.1 34.53,29.1 34.54,29.08
OUT5
  Top 0.254: U3.9 38.65,32.3 37.34,30.99 37.34,29.08 | JP5.3 37.34,29.08 | R11.1 37.32,29.1 37.34,29.08
OUT6
  Top 0.254: U3.10 41.17,31.01 40.13,29.97 40.13,29.08 | JP6.3 40.13,29.08 | R12.1 40.12,29.1 40.13,29.08
OUT7
  Top 0.254: U3.11 41.67,30.98 42.93,29.72 42.93,29.08 | JP7.3 42.93,29.08 | R13.1 42.91,29.1 42.93,29.08
OUT8
  Top 0.254: JP8.3 45.72,29.08 | R14.1 45.7,29.1 45.72,29.08 | U3.14 43.17,31.25 43.69,30.73 45.09,30.73 45.72,30.1 45.72,29.08
OUT9
  Top 0.254: U3.15 43.67,31.64 44.07,31.24 46.61,31.24 48.51,29.34 48.51,29.08 | J9.3 48.51,29.08 | R15.1 48.5,29.1 48.51,29.08
OUT10
  Top 0.254: U3.16 48.73,32.3 51.31,29.72 51.31,29.08 | JP10.3 51.31,29.08 | R16.1 51.29,29.1 51.31,29.08
OUT11
  Top 0.254: JP11.3 54.1,29.08 | 54.1,29.08 54.1,29.46 50.52,33.05 U3.17 | R17.1 54.09,29.1 54.1,29.08
OUT12
  Top 0.254: 56.9,29.08 56.9,29.21 55.75,30.35 | 56.9,29.08 JP12.3 | U3.18 52.56,33.55 55.75,30.35 | 56.9,29.08 56.88,29.1 | R18.1 55.63,30.23 55.75,30.35
OUT13
  Top 0.254: 59.69,29.08 59.69,30.23 55.87,34.05 U3.19 | 59.69,29.08 JP13.3 | R19.1 59.67,29.1 59.69,29.08
OUT14
  Top 0.254: 62.48,29.08 62.48,29.97 57.91,34.55 U3.20 | 62.48,29.08 JP14.3 | R20.1 62.47,29.1 62.48,29.08
OUT15
  Top 0.254: 65.28,29.08 65.28,29.21 59.44,35.05 U3.21 | 65.28,29.08 JP15.3 | R21.1 65.26,29.1 65.28,29.08
OUT16
  Top 0.254: U4.4 88.9,35.05 83.57,29.72 83.57,29.08 | JP24.3 83.57,29.08 | 83.57,29.08 83.55,29.1 | 83.57,29.08 82.31,29.08 R27.1
OUT17
  Top 0.254: U4.6 92.98,34.05 89.15,30.23 89.15,29.08 | JP31.3 89.15,29.08 | 89.15,29.08 89.14,29.1 | 89.15,29.08 87.9,29.08 R29.1
OUT18
  Top 0.254: JP28.3 86.36,29.08 | 86.36,29.08 86.36,29.97 89.28,32.89 89.92,33.53 90.94,34.55 U4.5 | 86.36,29.08 86.34,29.1 R28.1
OUT19
  Top 0.254: JP35.3 91.95,29.08 | 91.95,29.08 91.95,30.48 95.02,33.55 U4.7 | 91.95,29.08 91.93,29.1 | 91.95,29.08 90.69,29.08 R30.1
OUT20
  Top 0.254: JP25.3 94.74,29.08 | 94.74,29.08 94.74,30.73 97.06,33.05 U4.8 | R31.1 94.73,29.1 94.74,29.08
OUT21
  Top 0.254: U4.9 98.85,32.3 97.54,30.99 97.54,29.08 | JP29.3 97.54,29.08 | R32.1 97.52,29.1 97.54,29.08
OUT22
  Top 0.254: U4.10 101.37,31.01 100.33,29.97 100.33,29.08 | JP32.3 100.33,29.08 | R33.1 100.31,29.1 100.33,29.08
OUT23
  Top 0.254: U4.11 101.87,30.98 103.12,29.72 103.12,29.08 | JP36.3 103.12,29.08 | R34.1 103.11,29.1 103.12,29.08
OUT24
  Top 0.254: JP26.3 105.92,29.08 | R35.1 105.9,29.1 105.92,29.08 | U4.14 103.37,31.25 103.89,30.73 105.28,30.73 105.92,30.1 105.92,29.08
OUT25
  Top 0.254: U4.15 103.87,31.64 104.27,31.24 106.81,31.24 108.71,29.34 108.71,29.08 | J1.3 108.71,29.08 | R36.1 108.7,29.1 108.71,29.08
OUT26
  Top 0.254: U4.16 108.93,32.3 111.51,29.72 111.51,29.08 | JP33.3 111.51,29.08 | R37.1 111.49,29.1 111.51,29.08
OUT27
  Top 0.254: JP37.3 114.3,29.08 | 114.3,29.08 114.3,29.46 110.72,33.05 U4.17 | R38.1 114.28,29.1 114.3,29.08
OUT28
  Top 0.254: 117.09,29.08 117.09,29.21 115.95,30.35 | 117.09,29.08 JP27.3 | U4.18 112.76,33.55 115.95,30.35 | 117.09,29.08 117.08,29.1 | R39.1 115.82,30.23 115.95,30.35
OUT29
  Top 0.254: 119.89,29.08 119.89,30.23 116.07,34.05 U4.19 | 119.89,29.08 JP30.3 | R40.1 119.87,29.1 119.89,29.08
OUT30
  Top 0.254: 122.68,29.08 122.68,29.97 118.11,34.55 U4.20 | 122.68,29.08 JP34.3 | R41.1 122.67,29.1 122.68,29.08
OUT31
  Top 0.254: 125.48,29.08 125.48,29.21 119.64,35.05 U4.21 | 125.48,29.08 JP38.3 | R42.1 125.46,29.1 125.48,29.08
OUT32
  Top 0.254: U7.4 28.7,88.9 23.37,83.57 23.37,82.93 | JP48.3 23.37,82.93 | 23.37,82.93 23.35,82.95 | 23.37,82.93 22.11,82.93 R48.1
OUT33
  Top 0.254: U7.6 32.78,87.9 28.96,84.07 28.96,82.93 | JP55.3 28.96,82.93 | 28.96,82.93 28.94,82.95 | 28.96,82.93 27.7,82.93 R50.1
OUT34
  Top 0.254: JP52.3 26.16,82.93 | 26.16,82.93 26.16,83.82 29.08,86.74 29.72,87.38 30.74,88.4 U7.5 | 26.16,82.93 26.15,82.95 R49.1
OUT35
  Top 0.254: JP59.3 31.75,82.93 | 31.75,82.93 31.75,84.33 34.82,87.4 U7.7 | 31.75,82.93 31.73,82.95 | 31.75,82.93 30.5,82.93 R51.1
OUT36
  Top 0.254: JP49.3 34.54,82.93 | 34.54,82.93 34.54,84.58 36.86,86.9 U7.8 | R52.1 34.53,82.95 34.54,82.93
OUT37
  Top 0.254: U7.9 38.65,86.15 37.34,84.84 37.34,82.93 | JP53.3 37.34,82.93 | R53.1 37.32,82.95 37.34,82.93
OUT38
  Top 0.254: U7.10 41.17,84.86 40.13,83.82 40.13,82.93 | JP56.3 40.13,82.93 | R54.1 40.12,82.95 40.13,82.93
OUT39
  Top 0.254: U7.11 41.67,84.82 42.93,83.57 42.93,82.93 | JP60.3 42.93,82.93 | R55.1 42.91,82.95 42.93,82.93
OUT40
  Top 0.254: JP50.3 45.72,82.93 | R56.1 45.7,82.95 45.72,82.93 | U7.14 43.17,85.1 43.69,84.58 45.09,84.58 45.72,83.95 45.72,82.93
OUT41
  Top 0.254: U7.15 43.67,85.49 44.07,85.09 46.61,85.09 48.51,83.19 48.51,82.93 | J2.3 48.51,82.93 | R57.1 48.5,82.95 48.51,82.93
OUT42
  Top 0.254: U7.16 48.73,86.15 51.31,83.57 51.31,82.93 | JP57.3 51.31,82.93 | R58.1 51.29,82.95 51.31,82.93
OUT43
  Top 0.254: JP61.3 54.1,82.93 | 54.1,82.93 54.1,83.31 50.52,86.9 U7.17 | R59.1 54.09,82.95 54.1,82.93
OUT44
  Top 0.254: 56.9,82.93 56.9,83.06 55.75,84.2 | 56.9,82.93 JP51.3 | U7.18 52.56,87.4 55.75,84.2 | 56.9,82.93 56.88,82.95 | R60.1 55.63,84.07 55.75,84.2
OUT45
  Top 0.254: 59.69,82.93 59.69,84.07 55.87,87.9 U7.19 | 59.69,82.93 JP54.3 | R61.1 59.67,82.95 59.69,82.93
OUT46
  Top 0.254: 62.48,82.93 62.48,83.82 57.91,88.4 U7.20 | 62.48,82.93 JP58.3 | R62.1 62.47,82.95 62.48,82.93
OUT47
  Top 0.254: 65.28,82.93 65.28,83.06 59.44,88.9 U7.21 | 65.28,82.93 JP62.3 | R63.1 65.26,82.95 65.28,82.93
OUT48
  Top 0.254: U10.4 88.9,88.9 83.57,83.57 83.57,82.93 | JP72.3 83.57,82.93 | 83.57,82.93 83.55,82.95 | 83.57,82.93 82.31,82.93 R69.1
OUT49
  Top 0.254: U10.6 92.98,87.9 89.15,84.07 89.15,82.93 | JP79.3 89.15,82.93 | 89.15,82.93 89.14,82.95 | 89.15,82.93 87.9,82.93 R71.1
OUT50
  Top 0.254: JP76.3 86.36,82.93 | 86.36,82.93 86.36,83.82 89.28,86.74 89.92,87.38 90.94,88.4 U10.5 | 86.36,82.93 86.34,82.95 R70.1
OUT51
  Top 0.254: JP83.3 91.95,82.93 | 91.95,82.93 91.95,84.33 95.02,87.4 U10.7 | 91.95,82.93 91.93,82.95 | 91.95,82.93 90.69,82.93 R72.1
OUT52
  Top 0.254: JP73.3 94.74,82.93 | 94.74,82.93 94.74,84.58 97.06,86.9 U10.8 | R73.1 94.73,82.95 94.74,82.93
OUT53
  Top 0.254: U10.9 98.85,86.15 97.54,84.84 97.54,82.93 | JP77.3 97.54,82.93 | R74.1 97.52,82.95 97.54,82.93
OUT54
  Top 0.254: U10.10 101.37,84.86 100.33,83.82 100.33,82.93 | JP80.3 100.33,82.93 | R75.1 100.31,82.95 100.33,82.93
OUT55
  Top 0.254: U10.11 101.87,84.82 103.12,83.57 103.12,82.93 | JP84.3 103.12,82.93 | R76.1 103.11,82.95 103.12,82.93
OUT56
  Top 0.254: JP74.3 105.92,82.93 | R77.1 105.9,82.95 105.92,82.93 | U10.14 103.37,85.1 103.89,84.58 105.28,84.58 105.92,83.95 105.92,82.93
OUT57
  Top 0.254: U10.15 103.87,85.49 104.27,85.09 106.81,85.09 108.71,83.19 108.71,82.93 | J3.3 108.71,82.93 | R78.1 108.7,82.95 108.71,82.93
OUT58
  Top 0.254: U10.16 108.93,86.15 111.51,83.57 111.51,82.93 | JP81.3 111.51,82.93 | R79.1 111.49,82.95 111.51,82.93
OUT59
  Top 0.254: JP85.3 114.3,82.93 | 114.3,82.93 114.3,83.31 110.72,86.9 U10.17 | R80.1 114.28,82.95 114.3,82.93
OUT60
  Top 0.254: 117.09,82.93 117.09,83.06 115.95,84.2 | 117.09,82.93 JP75.3 | U10.18 112.76,87.4 115.95,84.2 | 117.09,82.93 117.08,82.95 | R81.1 115.82,84.07 115.95,84.2
OUT61
  Top 0.254: 119.89,82.93 119.89,84.07 116.07,87.9 U10.19 | 119.89,82.93 JP78.3 | R82.1 119.87,82.95 119.89,82.93
OUT62
  Top 0.254: 122.68,82.93 122.68,83.82 118.11,88.4 U10.20 | 122.68,82.93 JP82.3 | R83.1 122.67,82.95 122.68,82.93
OUT63
  Top 0.254: 125.48,82.93 125.48,83.06 119.64,88.9 U10.21 | 125.48,82.93 JP86.3 | R84.1 125.46,82.95 125.48,82.93
SCLK  (via drill 0.51)
  Top 0.254: v27.18,42.42 33.53,42.42 39.4,36.55 U3.1
  Bottom 0.254: U1.D13 v27.18,42.42 27.18,38.61 30.99,34.8 50.04,34.8 52.58,37.34 JP9.5
SCLK1  (via drill 0.51)
  Top 0.254: v87.38,42.42 93.73,42.42 99.6,36.55 U4.1
  Bottom 0.254: U5.D13 v87.38,42.42 87.38,38.61 91.19,34.8 110.24,34.8 112.78,37.34 JP43.5
SCLK2  (via drill 0.51)
  Top 0.254: v27.18,96.27 33.53,96.27 39.4,90.4 U7.1
  Bottom 0.254: U8.D13 v27.18,96.27 27.18,92.46 30.99,88.65 50.04,88.65 52.58,91.19 JP67.5
SCLK3  (via drill 0.51)
  Top 0.254: v87.38,96.27 93.73,96.27 99.6,90.4 U10.1
  Bottom 0.254: U11.D13 v87.38,96.27 87.38,92.46 91.19,88.65 110.24,88.65 112.78,91.19 JP91.5
SIN  (via drill 0.51)
  Top 0.254: U3.2 37.36,36.05 v32.26,41.15
  Bottom 0.254: v32.26,41.15 U1.D11
SIN1  (via drill 0.51)
  Top 0.254: U4.2 97.56,36.05 v92.46,41.15
  Bottom 0.254: v92.46,41.15 U5.D11
SIN2  (via drill 0.51)
  Top 0.254: U7.2 37.36,89.9 v32.26,95
  Bottom 0.254: v32.26,95 U8.D11
SIN3  (via drill 0.51)
  Top 0.254: U10.2 97.56,89.9 v92.46,95
  Bottom 0.254: v92.46,95 U11.D11
SOUT
  Top 0.254: U3.23 46.84,36.05 50.67,39.88 JP9.4
SOUT1
  Top 0.254: U4.23 107.04,36.05 110.87,39.88 JP43.4
SOUT2
  Top 0.254: U7.23 46.84,89.9 50.67,93.73 JP67.4
SOUT3
  Top 0.254: U10.23 107.04,89.9 110.87,93.73 JP91.4
VCC  (via drill 0.51)
  Top 0.254: v22.1,26.67 R6.2 | v24.89,26.67 R7.2 | v27.69,26.67 R8.2 | v30.48,26.67 R9.2 | v33.27,26.67 R10.2 | v36.07,26.67 R11.2 | v38.86,26.67 R12.2 | v41.66,26.67 R13.2 | v44.45,26.67 R14.2 | v47.24,26.67 R15.2 | v50.04,26.67 R16.2 | v52.83,26.67 R17.2 | v55.63,26.54 R18.2 | v58.42,26.54 R19.2 | v61.21,26.54 R20.2 | v64.01,26.54 R21.2
  Top 0.635: 18.29,9.14 18.29,14.48 18.29,14.73 S1.2
  Top 1.27: S1.2 v18.29,23.37
  Bottom 0.254: 54.42,27.75 v55.63,26.54 v58.42,26.54 v61.21,26.54 v64.01,26.54
  Bottom 1.27: JP15.2 JP14.2 JP13.2 JP12.2 JP11.2 JP10.2 J9.2 JP8.2 JP7.2 JP6.2 JP5.2 JP4.2 JP3.2 JP2.2 JP1.2 JP0.2 20.83,20.83 v18.29,23.37 21.59,26.67 v22.1,26.67 v24.89,26.67 v27.69,26.67 v30.48,26.67 v33.27,26.67 v36.07,26.67 v38.86,26.67 v41.66,26.67 v44.45,26.67 v47.24,26.67 v50.04,26.67 v52.83,26.67 53.34,26.67 54.42,27.75 61.47,34.8 JP9.6
VCC1  (via drill 0.51)
  Top 0.254: v82.3,26.67 R27.2 | v85.09,26.67 R28.2 | v87.88,26.67 R29.2 | v90.68,26.67 R30.2 | v93.47,26.67 R31.2 | v96.27,26.67 R32.2 | v99.06,26.67 R33.2 | v101.85,26.67 R34.2 | v104.65,26.67 R35.2 | v107.44,26.67 R36.2 | v110.24,26.67 R37.2 | v113.03,26.67 R38.2 | v115.82,26.54 R39.2 | v118.62,26.54 R40.2 | v121.41,26.54 R41.2 | v124.21,26.54 R42.2
  Top 0.635: 78.49,9.14 78.49,14.48 78.49,14.73 S2.2
  Top 1.27: S2.2 v78.49,23.37
  Bottom 0.254: 114.62,27.75 v115.82,26.54 v118.62,26.54 v121.41,26.54 v124.21,26.54
  Bottom 1.27: JP38.2 JP34.2 JP30.2 JP27.2 JP37.2 JP33.2 J1.2 JP26.2 JP36.2 JP32.2 JP29.2 JP25.2 JP35.2 JP31.2 JP28.2 JP24.2 81.03,20.83 v78.49,23.37 81.79,26.67 v82.3,26.67 v85.09,26.67 v87.88,26.67 v90.68,26.67 v93.47,26.67 v96.27,26.67 v99.06,26.67 v101.85,26.67 v104.65,26.67 v107.44,26.67 v110.24,26.67 v113.03,26.67 113.54,26.67 114.62,27.75 121.67,34.8 JP43.6
VCC2  (via drill 0.51)
  Top 0.254: v22.1,80.52 R48.2 | v24.89,80.52 R49.2 | v27.69,80.52 R50.2 | v30.48,80.52 R51.2 | v33.27,80.52 R52.2 | v36.07,80.52 R53.2 | v38.86,80.52 R54.2 | v41.66,80.52 R55.2 | v44.45,80.52 R56.2 | v47.24,80.52 R57.2 | v50.04,80.52 R58.2 | v52.83,80.52 R59.2 | v55.63,80.39 R60.2 | v58.42,80.39 R61.2 | v61.21,80.39 R62.2 | v64.01,80.39 R63.2
  Top 0.635: 18.29,62.99 18.29,68.33 18.29,68.58 S3.2
  Top 1.27: S3.2 v18.29,77.22
  Bottom 0.254: 54.42,81.6 v55.63,80.39 v58.42,80.39 v61.21,80.39 v64.01,80.39
  Bottom 1.27: JP62.2 JP58.2 JP54.2 JP51.2 JP61.2 JP57.2 J2.2 JP50.2 JP60.2 JP56.2 JP53.2 JP49.2 JP59.2 JP55.2 JP52.2 JP48.2 20.83,74.68 v18.29,77.22 21.59,80.52 v22.1,80.52 v24.89,80.52 v27.69,80.52 v30.48,80.52 v33.27,80.52 v36.07,80.52 v38.86,80.52 v41.66,80.52 v44.45,80.52 v47.24,80.52 v50.04,80.52 v52.83,80.52 53.34,80.52 54.42,81.6 61.47,88.65 JP67.6
VCC3  (via drill 0.51)
  Top 0.254: v82.3,80.52 R69.2 | v85.09,80.52 R70.2 | v87.88,80.52 R71.2 | v90.68,80.52 R72.2 | v93.47,80.52 R73.2 | v96.27,80.52 R74.2 | v99.06,80.52 R75.2 | v101.85,80.52 R76.2 | v104.65,80.52 R77.2 | v107.44,80.52 R78.2 | v110.24,80.52 R79.2 | v113.03,80.52 R80.2 | v115.82,80.39 R81.2 | v118.62,80.39 R82.2 | v121.41,80.39 R83.2 | v124.21,80.39 R84.2
  Top 0.635: 78.49,62.99 78.49,68.33 78.49,68.58 S4.2
  Top 1.27: S4.2 v78.49,77.22
  Bottom 0.254: 114.62,81.6 v115.82,80.39 v118.62,80.39 v121.41,80.39 v124.21,80.39
  Bottom 1.27: JP86.2 JP82.2 JP78.2 JP75.2 JP85.2 JP81.2 J3.2 JP74.2 JP84.2 JP80.2 JP77.2 JP73.2 JP83.2 JP79.2 JP76.2 JP72.2 81.03,74.68 v78.49,77.22 81.79,80.52 v82.3,80.52 v85.09,80.52 v87.88,80.52 v90.68,80.52 v93.47,80.52 v96.27,80.52 v99.06,80.52 v101.85,80.52 v104.65,80.52 v107.44,80.52 v110.24,80.52 v113.03,80.52 113.54,80.52 114.62,81.6 121.67,88.65 JP91.6
VIN  (via drill 0.51)
  Top 0.254: C1.A 17.91,47.5 v20.83,44.58
  Top 0.635: 15.79,9.14 15.79,14.61
  Top 1.27: U2.3 22.75,42.65 v20.83,44.58 | JP20.2 14.48,21.83 15.79,20.52 S1.1 15.79,14.61
  Bottom 1.27: JP21.2 8.64,22.61 JP19.1 12.05,22.61 JP20.2 | v20.83,44.58 20.83,32.26 18.29,29.72 14.48,29.72 12.83,28.07 JP20.2 | U1.VIN 43.69,11.94 41.15,14.48 21.83,14.48 14.48,21.83 JP20.2
VIN1  (via drill 0.51)
  Top 0.254: C4.A 78.11,47.5 v81.03,44.58
  Top 0.635: 75.99,9.14 75.99,14.61
  Top 1.27: U6.3 82.95,42.65 v81.03,44.58 | JP40.2 74.68,21.83 75.99,20.52 S2.1 75.99,14.61
  Bottom 1.27: JP41.2 68.83,22.61 JP39.1 72.25,22.61 JP40.2 | v81.03,44.58 81.03,32.26 78.49,29.72 74.68,29.72 73.03,28.07 JP40.2 | U5.VIN 103.89,11.94 101.35,14.48 82.03,14.48 74.68,21.83 JP40.2
VIN2  (via drill 0.51)
  Top 0.254: C7.A 17.91,101.35 v20.83,98.42
  Top 0.635: 15.79,62.99 15.79,68.45
  Top 1.27: U9.3 22.75,96.5 v20.83,98.42 | JP64.2 14.48,75.68 15.79,74.37 S3.1 15.79,68.45
  Bottom 1.27: JP65.2 8.64,76.45 JP63.1 12.05,76.45 JP64.2 | v20.83,98.42 20.83,86.11 18.29,83.57 14.48,83.57 12.83,81.92 JP64.2 | U8.VIN 43.69,65.79 41.15,68.33 21.83,68.33 14.48,75.68 JP64.2
VIN3  (via drill 0.51)
  Top 0.254: C10.A 78.11,101.35 v81.03,98.42
  Top 0.635: 75.99,62.99 75.99,68.45
  Top 1.27: U12.3 82.95,96.5 v81.03,98.42 | JP88.2 74.68,75.68 75.99,74.37 S4.1 75.99,68.45
  Bottom 1.27: JP89.2 68.83,76.45 JP87.1 72.25,76.45 JP88.2 | v81.03,98.42 81.03,86.11 78.49,83.57 74.68,83.57 73.03,81.92 JP88.2 | U11.VIN 103.89,65.79 101.35,68.33 82.03,68.33 74.68,75.68 JP88.2
VPRG  (via drill 0.51)
  Top 0.254: U3.3 36.59,35.55 v32.26,39.88
  Bottom 0.254: v32.26,39.88 34.8,39.88 36.07,41.15 36.07,44.96 38.61,47.5 SJ2.2 39.88,46.61
VPRG1  (via drill 0.51)
  Top 0.254: U4.3 96.79,35.55 v92.46,39.88
  Bottom 0.254: v92.46,39.88 95,39.88 96.27,41.15 96.27,44.96 98.81,47.5 SJ3.2 100.08,46.61
VPRG2  (via drill 0.51)
  Top 0.254: U7.3 36.59,89.4 v32.26,93.73
  Bottom 0.254: v32.26,93.73 34.8,93.73 36.07,95 36.07,98.81 38.61,101.35 SJ5.2 39.88,100.46
VPRG3  (via drill 0.51)
  Top 0.254: U10.3 96.79,89.4 v92.46,93.73
  Bottom 0.254: v92.46,93.73 95,93.73 96.27,95 96.27,98.81 98.81,101.35 SJ7.2 100.08,100.46
XERR  (via drill 0.51)
  Top 0.254: U3.22 48.25,35.55 v48.77,36.07
  Bottom 0.254: SJ1.2 29.72,39.88 32.26,37.34 42.42,37.34 43.69,36.07 v48.77,36.07
XERR1  (via drill 0.51)
  Top 0.254: U4.22 108.45,35.55 v108.97,36.07
  Bottom 0.254: SJ4.2 89.92,39.88 92.46,37.34 102.62,37.34 103.89,36.07 v108.97,36.07
XERR2  (via drill 0.51)
  Top 0.254: U7.22 48.25,89.4 v48.77,89.92
  Bottom 0.254: SJ6.2 29.72,93.73 32.26,91.19 42.42,91.19 43.69,89.92 v48.77,89.92
XERR3  (via drill 0.51)
  Top 0.254: U10.22 108.45,89.4 v108.97,89.92
  Bottom 0.254: SJ8.2 89.92,93.73 92.46,91.19 102.62,91.19 103.89,89.92 v108.97,89.92
XLAT  (via drill 0.51)
  Top 0.254: U1.D9 39.24,55.75 39.88,55.12 50.04,44.96 JP9.2 | U3.32 39.92,37.3 v34.8,42.42
  Bottom 0.254: v34.8,42.42 34.8,44.96 37.34,47.5 U1.D9
XLAT1  (via drill 0.51)
  Top 0.254: U5.D9 99.44,55.75 100.08,55.12 110.24,44.96 JP43.2 | U4.32 100.12,37.3 v95,42.42
  Bottom 0.254: v95,42.42 95,44.96 97.54,47.5 U5.D9
XLAT2  (via drill 0.51)
  Top 0.254: U8.D9 39.24,109.6 39.88,108.97 50.04,98.81 JP67.2 | U7.32 39.92,91.15 v34.8,96.27
  Bottom 0.254: v34.8,96.27 34.8,98.81 37.34,101.35 U8.D9
XLAT3  (via drill 0.51)
  Top 0.254: U11.D9 99.44,109.6 100.08,108.97 110.24,98.81 JP91.2 | U10.32 100.12,91.15 v95,96.27
  Bottom 0.254: v95,96.27 95,98.81 97.54,101.35 U11.D9

## Text on the board
Bottom: 4/15/11 | 4/15/11 | 4/15/11 | 4/15/11
Dimension: Route Out | Route Out | Route Out | Route Out | Route Out | Route Out | Route Out | Route Out | Route Out
tPlace: AREF | GND | SCLK-13 | 12 | SIN-11 | BLANK-10 | XLAT-9 | 8 | 7 | 6 | 5 | 4 | GSCLK-3 | 2 | TX | RX | AREF | GND | SCLK-13 | 12 | SIN-11 | BLANK-10 | XLAT-9 | 8 | 7 | 6 | 5 | 4 | GSCLK-3 | 2 | TX | RX | GSCLK | GSCLK | XLAT | XLAT | BLANK | BLANK | SOUT | SOUT | SCLK | SCLK | OUTPUT | OUTPUT | Vcc | Vcc | GND | GND | PWM Shield | PWM Shield | 0 | 1 | 2 | 3 | 4 | 5 | 6 | 7 | 8 | 9 | 10 | 11 | 12 | 13 | 14 | 15 | 0 | 1 | 2 | 3 | 4 | 5 | 6 | 7 | 8 | 9 | 10 | 11 | 12 | 13 | 14 | 15 | SIG | SIG | Vcc | Vcc | GND | GND | 6.5-16V | 6.5-16V | VIN | VIN | Analog In | Analog In | Vin | 5V | RST | 3.3V | 5V | GND | GND | VIN | 0 | 1 | 2 | 3 | 4 | 5 | Vin | 5V | RST | 3.3V | 5V | GND | GND | VIN | 0 | 1 | 2 | 3 | 4 | 5 | Vcc Select | Vcc Select | AREF | GND | SCLK-13 | 12 | SIN-11 | BLANK-10 | XLAT-9 | 8 | 7 | 6 | 5 | 4 | GSCLK-3 | 2 | TX | RX | AREF | GND | SCLK-13 | 12 | SIN-11 | BLANK-10 | XLAT-9 | 8 | 7 | 6 | 5 | 4 | GSCLK-3 | 2 | TX | RX | GSCLK | GSCLK | XLAT | XLAT | BLANK | BLANK | SOUT | SOUT | SCLK | SCLK | OUTPUT | OUTPUT | Vcc | Vcc | GND | GND | PWM Shield | PWM Shield | 0 | 1 | 2 | 3 | 4 | 5 | 6 | 7 | 8 | 9 | 10 | 11 | 12 | 13 | 14 | 15 | 0 | 1 | 2 | 3 | 4 | 5 | 6 | 7 | 8 | 9 | 10 | 11 | 12 | 13 | 14 | 15 | SIG | SIG | Vcc | Vcc | GND | GND | 6.5-16V | 6.5-16V | VIN | VIN | Analog In | Analog In | Vin | 5V | RST | 3.3V | 5V | GND | GND | VIN | 0 | 1 | 2 | 3 | 4 | 5 | Vin | 5V | RST | 3.3V | 5V | GND | GND | VIN | 0 | 1 | 2 | 3 | 4 | 5 | Vcc Select | Vcc Select
bPlace: D12 | XERR | D8 | D12 | XERR | D8 | VPRG | VPRG | 0 | 0 | PWM Shield | PWM Shield | D12 | XERR | D8 | D12 | XERR | D8 | VPRG | VPRG | 0 | 0 | PWM Shield | PWM Shield